# Altium PCB 编码器.PcbDoc
Units mil, origin at the board's own origin, x right, y up, seen from the top; angles counter-clockwise.
Board outline 2500 x 1695 mil, 2 copper layers (Top Layer, Bottom Layer); 79 components, 78 nets, 268 pads, 211 vias.
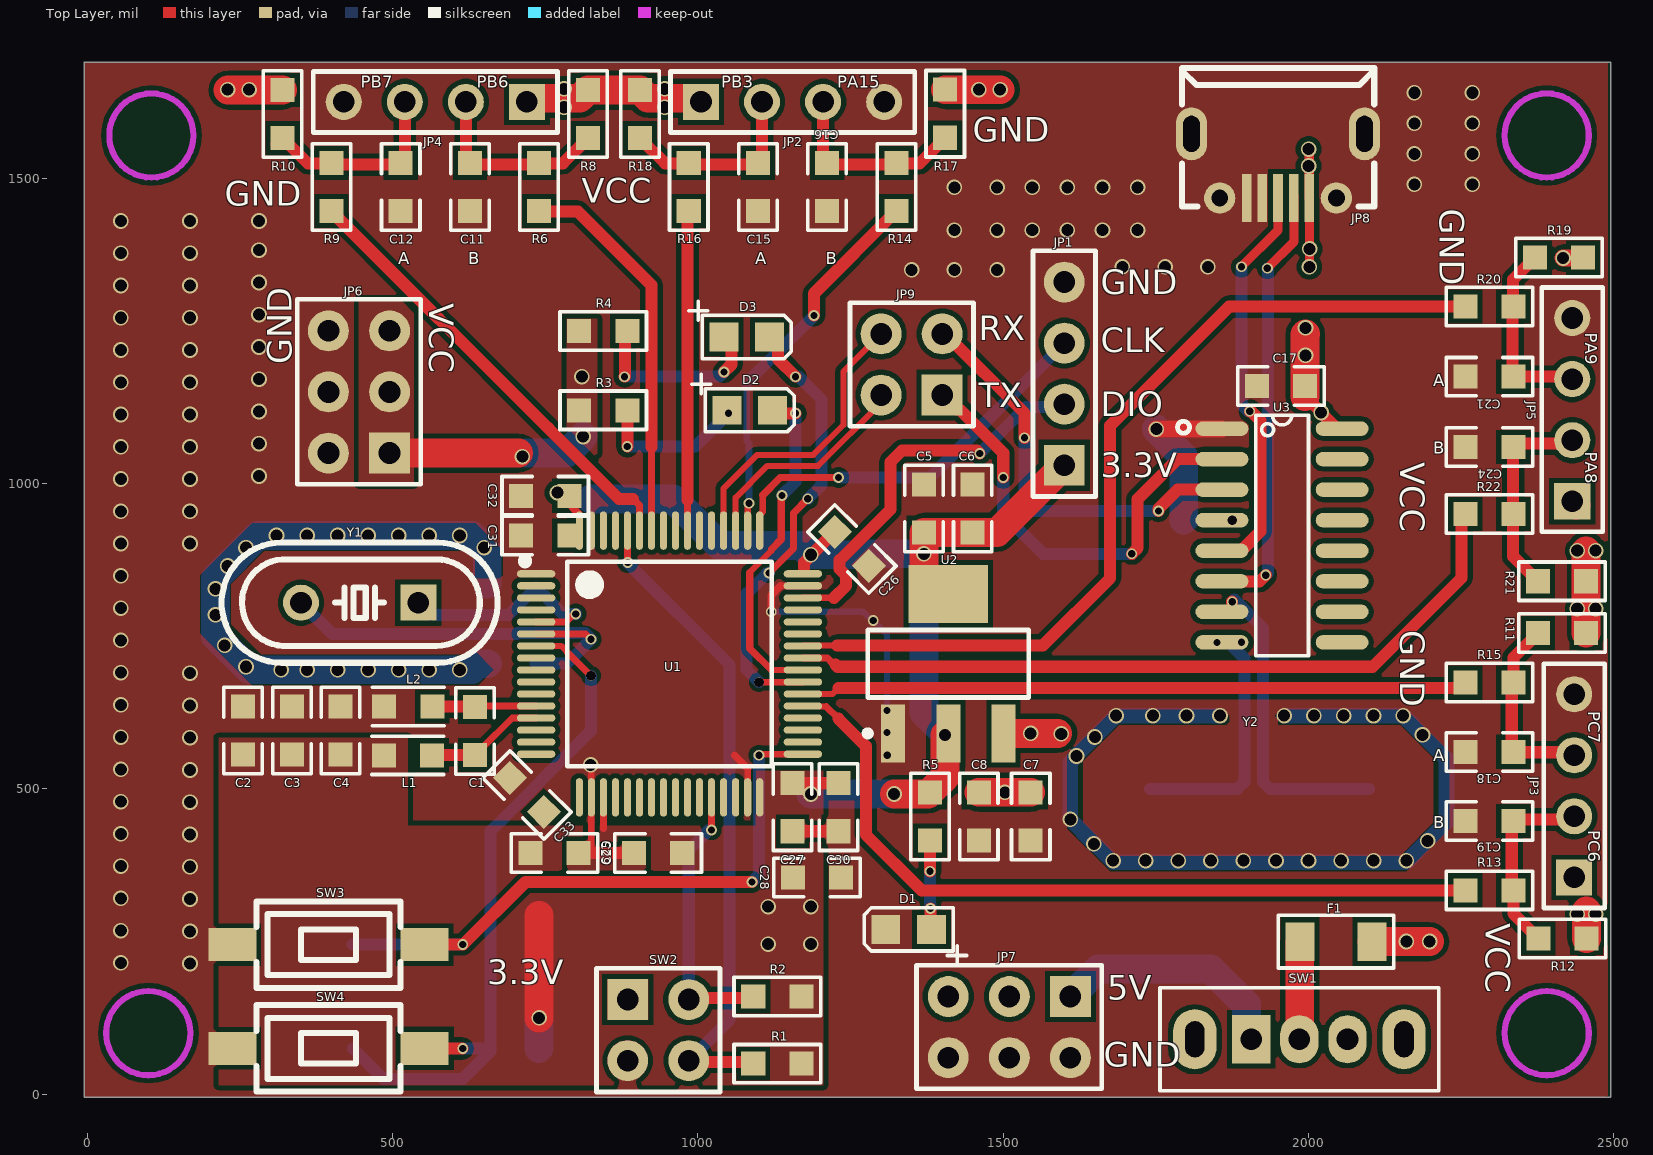
[diagram p0: Top Layer view]
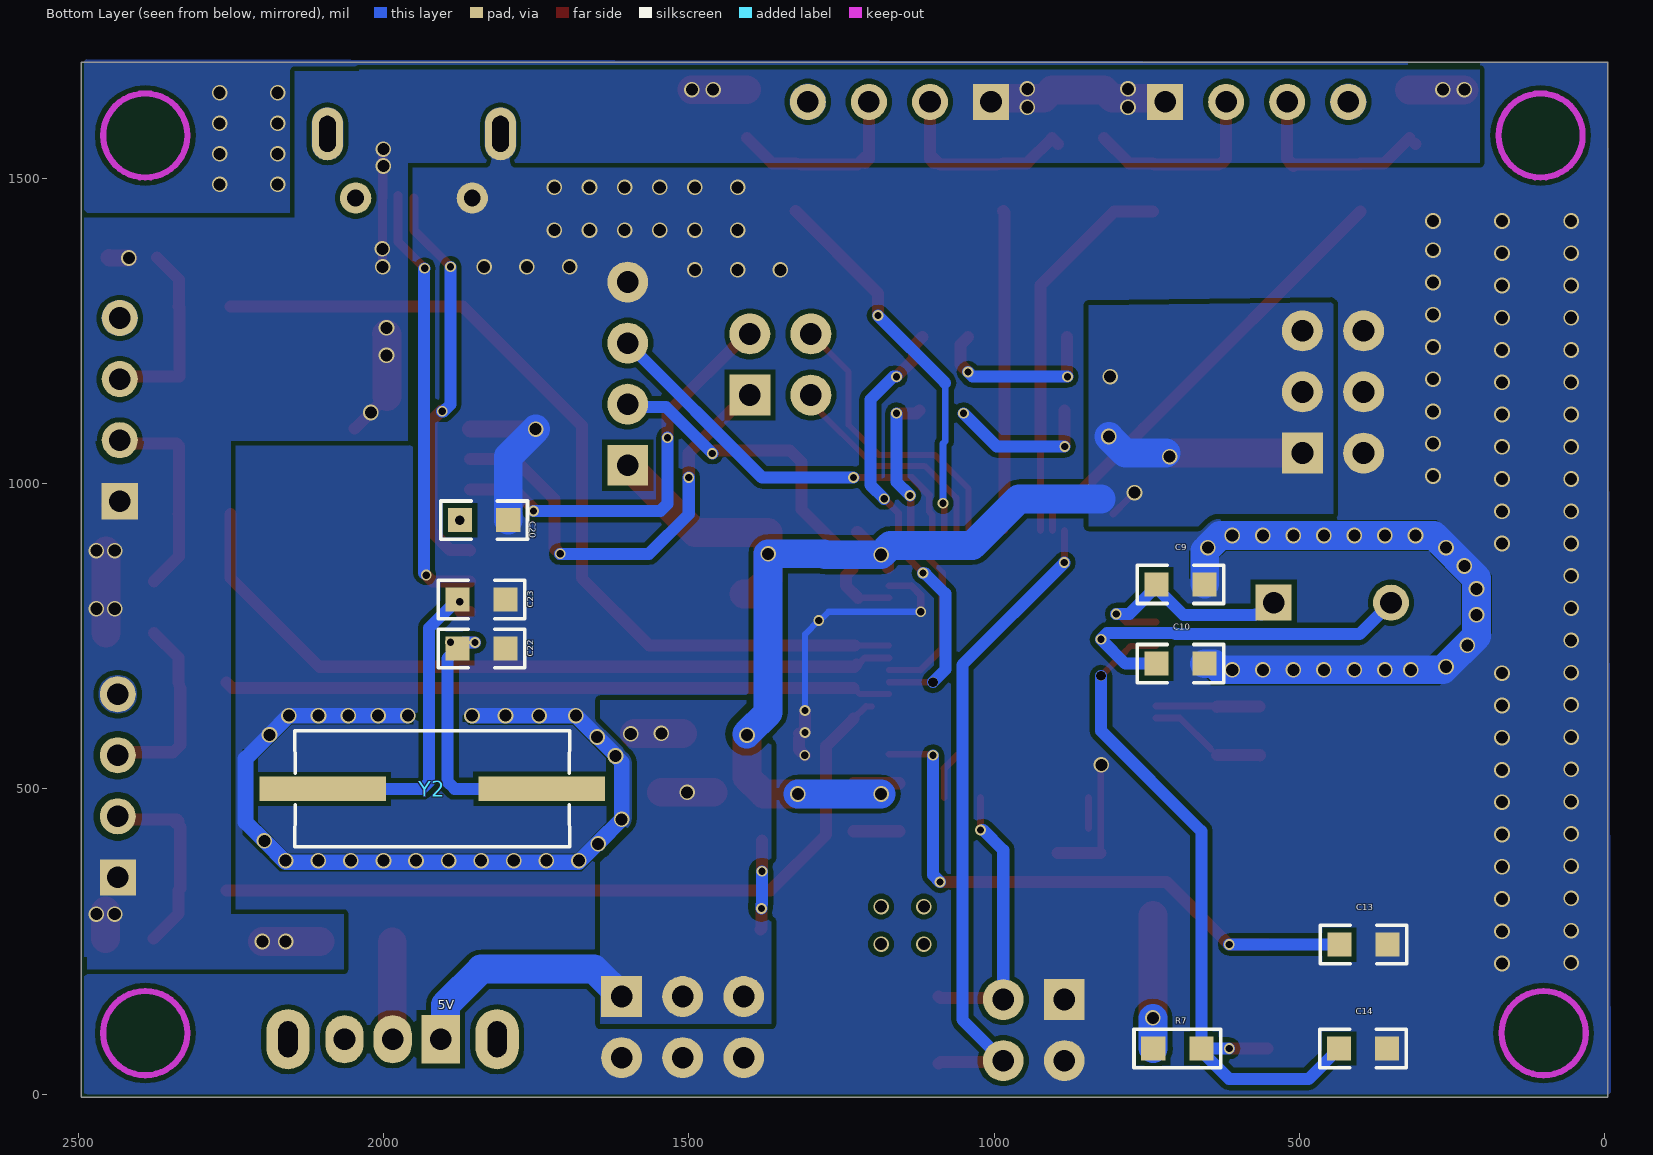
[diagram p1: Bottom Layer view, seen from below]

## Layer stack, top to bottom
Top Solder: solder mask 0.4, Solder Resist, Dk 3.5
Top Layer: signal copper 1.4
Dielectric 1: dielectric 12.6, FR-4, Dk 4.8
Bottom Layer: signal copper 1.4
Bottom Solder: solder mask 0.4, Solder Resist, Dk 3.5

## Board outline
-5,-5 -5,1690 2495,1690 2495,-5

## Design rules (kind name [scope] priority, off if disabled: settings)
Clearance Clearance_2 [InNetClass('PWR')] p1: gap=8 ignorepadtopadclearanceinfootprint=TRUE
Clearance Clearance_1 [InNetClass('GND')] p2: gap=8 ignorepadtopadclearanceinfootprint=TRUE
Clearance Clearance_3 [InNetClass('SIGNAL')] p3: gap=8 ignorepadtopadclearanceinfootprint=TRUE
Clearance [All] p4: gap=8 ignorepadtopadclearanceinfootprint=TRUE
DiffPairsRouting [All] p1: maxlimit=11.81 minlimit=8 mostfreqgap=10 toplayer_minwidth=8 toplayer_maxwidth=10 toplayer_prefwidth=10 bottomlayer_minwidth=8 bottomlayer_maxwidth=10 bottomlayer_prefwidth=10 maxuncoupledlength=500
PolygonConnect [All] p1: connectstyle=Direct reliefconductorwidth=10 reliefentries=4 polygonreliefangle="90 Angle" airgapwidth=10
RoutingVias [All] p1: holewidth=28 width=50 viastyle="Through Hole" minholewidth=28 minwidth=50 maxholewidth=28 maxwidth=50
SolderMaskExpansion [All] p1: expansion=4 istentingtop=FALSE
Width Width_1 [InNetClass('SIGNAL')] p1: maxlimit=47.24 minlimit=10 preferedwidth=19.68 minimp=50.000000 maximp=50.000000 favimp=50.000000
Width [InNetClass('PWR')] p2: maxlimit=47.24 minlimit=11.81 preferedwidth=47.24 minimp=50.000000 maximp=50.000000 favimp=50.000000
Width Width_4 [InNetClass('PWR')] p3: maxlimit=47.24 minlimit=11.81 preferedwidth=10 minimp=50.000000 maximp=50.000000 favimp=50.000000
Width Width_2 [InNetClass('GND')] p4: maxlimit=47.24 minlimit=11.81 preferedwidth=47.24 minimp=50.000000 maximp=50.000000 favimp=50.000000
Width Width_5 [InNetClass('SIGNAL')] p5: maxlimit=20 minlimit=11.81 preferedwidth=19.68 minimp=50.000000 maximp=50.000000 favimp=50.000000
Width Width_3 [All] p6: maxlimit=20 minlimit=5 preferedwidth=19.68 minimp=50.000000 maximp=50.000000 favimp=50.000000
29 further rules are at their usual default settings.

## Components (designator, comment, footprint, x,y, rotation, side; value= is the part's Value field where it differs from the comment)
C1 "0805c" 0805C 635,595 r90 top
C2 "0805c" 0805C 255,595.63 r90 top
C3 "0805c" 0805C 335,595.63 r90 top
C4 "0805c" 0805C 415,595.63 r90 top
C5 "0805c" 0805C 1370,959.37 r270 top
C6 "0805c" 0805C 1450,959.37 r270 top
C7 "0805c" 0805C 1545,455 r270 top
C8 "0805c" 0805C 1460,455 r270 top
C9 "22pF" 0805C 695,835 r180 bottom
C10 "22pF" 0805C 695,705 r180 bottom
C11 "10nF" 0805C 626.67,1485.63 r90 top
C12 "10nF" 0805C 513.33,1485.63 r90 top
C13 "0805c" 0805C 395,245 r180 bottom
C14 "0805c" 0805C 395.63,75 r180 bottom
C15 "10nF" 0805C 1098.33,1485.63 r90 top
C16 "10nF" 0805C 1211.67,1485.63 r270 top
C17 "0805c" 0805C 1955,1160 r0 top
C18 "10nF (103) 10% 50V" 0805C 2296.06,560.6 r180 top
C19 "10nF (103) 10% 50V" 0805C 2296.06,447.27 r180 top
C20 "0805c" 0805C 1835,940 r180 bottom
C21 "10nF" 0805C 2296.06,1175 r180 top
C22 "0805c" 0805C 1839.37,730 r180 bottom
C23 "0805c" 0805C 1839.37,810 r180 bottom
C24 "10nF" 0805C 2296.06,1060 r180 top
C25 "0805c" 0805C 765,395 r180 top
C26 "0805c" 0805C 1252.16,892.84 r135 top
C27 "0805c" 0805C 1155,470 r90 top
C28 "0805c" 0805C 1195,355 r0 top
C29 "0805c" 0805C 935,395 r0 top
C30 "0805c" 0805C 1230,470 r90 top
C31 "0805c" 0805C 750,915 r0 top
C32 "0805c" 0805C 750,980 r0 top
C33 "0805c" 0805C 720,490 r135 top
D1 "LED" 0805D 1345,270 r180 top
D2 "LED" 0805D 1085,1120 r0 top
D3 "LED" 0805D 1080,1240 r0 top
F1 "FUSE" 1206R 2045,250 r180 top
JP1 "SWD" SWD 1600,1180 r90 top
JP2 "PIN4" HDR1X4 1005,1625 r0 top
JP3 "PIN4" HDR1X4 2435,355 r90 top
JP4 "PIN4" HDR1X4 720,1625 r180 top
JP5 "PIN4" HDR1X4 2431.81,971.06 r90 top
JP6 "PWR3.3V" PWR 495,1050 r90 top
JP7 "PWR5V" PWR 1610,160 r180 top
JP8 "miniusb" MICRO-USB-SMD_MICROXNJ 1950,1520 r180 top
JP9 "2*2" CON20VP2R54-2X2TM 1350,1195 r90 top
L1 "0805L" 0805L 525,555 r0 top
L2 "0805L" 0805L 525.63,635 r0 top
R1 "0805r" 0805R 1130,50 r180 top
R2 "0805r" 0805R 1130,160 r180 top
R3 "0805r" 0805R 845,1120 r0 top
R4 "0805r" 0805R 845,1250 r0 top
R5 "0805r" 0805R 1380,455 r90 top
R6 "10KΩ" 0805R 740,1485.63 r270 top
R7 "0805r" 0805R 700,75 r0 bottom
R8 "10KΩ" 0805R 820,1605 r270 top
R9 "10KΩ" 0805R 400,1485.63 r270 top
R10 "10KΩ" 0805R 320,1605 r270 top
R11 "10KΩ" 0805R 2415,755 r180 top
R12 "10KΩ" 0805R 2415.63,255 r0 top
R13 "10KΩ" 0805R 2296.06,333.94 r0 top
R14 "10KΩ" 0805R 1325,1485.63 r270 top
R15 "10KΩ" 0805R 2296.06,673.94 r0 top
R16 "10KΩ" 0805R 985,1485.63 r270 top
R17 "10KΩ" 0805R 1405,1605.63 r90 top
R18 "10KΩ" 0805R 905,1605 r270 top
R19 "10KΩ" 0805R 2410,1370 r180 top
R20 "10KΩ" 0805R 2296.06,1290 r180 top
R21 "10KΩ" 0805R 2415,840 r180 top
R22 "10KΩ" 0805R 2296.06,950 r180 top
SW1 "SWTICH_3P" SWITCH_3P 1906.26,90 r0 top
SW2 "SW_BOOT" CON20VP2R54-2X2TM 935,105 r270 top
SW3 "KEY" SW-SMD_L6.1-W3.6-LS8.0 395,245 r180 top
SW4 "KEY" SW-SMD_L6.1-W3.6-LS8.0 395,75 r180 top
U1 "STM32F103RCT6" PCBComponent_1 786.61,869.53 r270 top
U2 "ASM1117-3.3" SOT223_N 1410,705 r90 top
U3 "CH340G" SOP16 1956.57,915 r270 top
Y1 "8MHz" HC-49US_L11.5-W4.5-P4.88 446.06,805 r180 top
Y2 "8MHz" HC-49S_L11.4-W4.8 1920,500 r180 top

## Footprints (in the part's own frame and the unit in brackets; to place one, negate y for a bottom-side part, rotate by r counter-clockwise, add the part's x,y. Pads: shape width x height; smd on the part's side, far side on the other; paste and mask are expansions set on the pad)
0805C [mm]
  rect 1x1 smd: 1(-1,0) 2(1,0)
  silkscreen extent -1.8,-0.8 1.8,0.8
0805D [mm]
  rect 1.2x1.2 smd: 1(-0.95,0) 2(0.95,0)
  silkscreen extent -2.42,-0.9 1.85,1.49
0805L [mm]
  rect 1x1 smd: 1(-1,0) 2(1,0)
  silkscreen extent -1.5,-0.8 1.5,0.8
0805R [mm]
  rect 1x1 smd: 1(-1,0) 2(1,0)
  silkscreen extent -1.8,-0.8 1.8,0.8
1206R [mm]
  rect 1.2x1.6 smd: 1(-1.5,0) 2(1.5,0)
  silkscreen extent -2.4,-1.1 2.4,1.1
CON20VP2R54-2X2TM [mm]
  rect 1.7x1.7 hole 0.9: 1(-1.27,-1.27)
  round 1.7 hole 0.9: 2(-1.27,1.27) 3(1.27,-1.27) 4(1.27,1.27)
  silkscreen extent -2.57,-2.57 2.57,2.57
HC-49S_L11.4-W4.8 [mm]
  rect 5.274x1.02 smd far side: 1(4.553,0) 2(-4.553,0)
HC-49US_L11.5-W4.5-P4.88 [mm]
  rect 1.5x1.5 hole 0.9: 1(-2.44,0)
  round 1.5 hole 0.9: 2(2.44,0)
  silkscreen extent -5.74,-2.5 5.74,2.5
HDR1X4 [mm] "Connector; Header; 4 Position"
  rect 1.5x1.5 hole 0.9: 1(0,0)
  round 1.5 hole 0.9: 2(2.54,0) 3(5.08,0) 4(7.62,0)
  silkscreen extent -1.27,-1.27 8.89,1.27
MICRO-USB-SMD_MICROXNJ [mm]
  rect 0.4x2 smd: 1(-1.3,1.327) 2(-0.65,1.327) 3(0,1.327) 4(0.65,1.327) 5(1.3,1.327)
  round 1.3 hole 0.7: 6(2.425,1.335) 9(-2.425,1.335)
  oval 1.3x2.2 hole 0.7 slot 1.5 at 90 deg: 7(3.6,-1.335) 8(-3.6,-1.335)
  silkscreen extent -4,-4.07 4,1.68
PCBComponent_1 [mm]
  oval 0.3x1.6 smd: 1(0.441,-1.311) 2(0.941,-1.311) 3(1.441,-1.311) 4(1.941,-1.311) 5(2.441,-1.311) 6(2.941,-1.311) 7(3.441,-1.311) 8(3.941,-1.311) 9(4.441,-1.311) 10(4.941,-1.311) 11(5.441,-1.311) 12(5.941,-1.311) 13(6.441,-1.311) 14(6.941,-1.311) 15(7.441,-1.311) 16(7.941,-1.311) 33(7.941,9.789) 34(7.441,9.789) 35(6.941,9.789) 36(6.441,9.789) 37(5.941,9.789) 38(5.441,9.789) 39(4.941,9.789) 40(4.441,9.789) 41(3.941,9.789) 42(3.441,9.789) 43(2.941,9.789) 44(2.441,9.789) 45(1.941,9.789) 46(1.441,9.789) 47(0.941,9.789) 48(0.441,9.789)
  oval 1.6x0.3 smd: 17(9.741,0.489) 18(9.741,0.989) 19(9.741,1.489) 20(9.741,1.989) 21(9.741,2.489) 22(9.741,2.989) 23(9.741,3.489) 24(9.741,3.989) 25(9.741,4.489) 26(9.741,4.989) 27(9.741,5.489) 28(9.741,5.989) 29(9.741,6.489) 30(9.741,6.989) 31(9.741,7.489) 32(9.741,7.989) 49(-1.359,7.989) 50(-1.359,7.489) 51(-1.359,6.989) 52(-1.359,6.489) 53(-1.359,5.989) 54(-1.359,5.489) 55(-1.359,4.989) 56(-1.359,4.489) 57(-1.359,3.989) 58(-1.359,3.489) 59(-1.359,2.989) 60(-1.359,2.489) 61(-1.359,1.989) 62(-1.359,1.489) 63(-1.359,0.989) 64(-1.359,0.489)
  silkscreen extent -0.24,-1.92 8.44,8.49
PWR [mm]
  rect 1.7x1.7 hole 0.9: 1(0,0)
  round 1.7 hole 0.9: 2(0,2.54) 3(2.54,0) 4(2.54,2.54) 5(5.08,0) 6(5.08,2.54)
  silkscreen extent -1.3,-1.3 6.4,3.84
SOP16 [mm]
  oval 0.6x2.2 smd: 1(-4.445,-2.5) 2(-3.175,-2.5) 3(-1.905,-2.5) 4(-0.635,-2.5) 5(0.635,-2.5) 6(1.905,-2.5) 7(3.175,-2.5) 8(4.445,-2.5) 9(4.445,2.5) 10(3.175,2.5) 11(1.905,2.5) 12(0.635,2.5) 13(-0.635,2.5) 14(-1.905,2.5) 15(-3.175,2.5) 16(-4.445,2.5)
  silkscreen extent -5,-4.35 5,1.1
SOT223_N [mm] "SOT223, 4-Leads, Body 6.5x3.5mm, Pitch 2.3mm, Lead Span 7mm, IPC Medium Density"
  rect 2.4x1 smd: 1(-2.9,2.3) 2(-2.9,0) 3(-2.9,-2.3)
  rect 2.4x3.3 smd: 4(2.9,0)
  silkscreen extent -3.02,-3.35 1.4,3.47, body extent -1.85,-3.35 1.85,3.35, height 1.7
SW-SMD_L6.1-W3.6-LS8.0 [mm]
  rect 2x1.38 smd: 1(-4,0) 2(4,0)
  silkscreen extent -3,-1.8 3,1.8
SWD [mm]
  rect 1.7x1.7 hole 0.9: 1(-3.81,0)
  round 1.7 hole 0.9: 2(-1.27,0) 3(1.27,0) 4(3.81,0)
  silkscreen extent -5.11,-1.3 5.11,1.3
SWITCH_3P [mm]
  rect 1.6x2 hole 0.9: 1(0,0)
  oval 1.6x2 hole 0.9: 2(2,0) 3(4,0)
  oval 1.8x2.5 hole 1.5 slot 0.8 at 0 deg: 4(-2.35,0) 4(6.35,0)
  silkscreen extent -3.8,-2.15 7.8,2.15

## Part data
C9 C10: library part "0805 22pF (220) 5% 50V", "贴片电容", Package=0805, SuppliersPartNumber=C1804, ComponentLink1Description=供应商链接, ComponentLink1URL=http://www.szlcsc.com/product/details_2156.html, Supplier=LC
C11 C12 C15 C16 C18 C19 C21 C24: library part "0805 10nF (103) 10% 50V", "贴片电容", Package=0805, SuppliersPartNumber=C1710, ComponentLink1Description=供应商链接, ComponentLink1URL=http://www.szlcsc.com/product/details_2062.html, Supplier=LC
R6 R8 R9 R10 R11 R12 R13 R14 R15 R16 R17 R18 R19 R20 R21 R22: library part "0805 10KΩ (1002) 1%", "贴片电阻", Package=0805, SuppliersPartNumber=C17414, ComponentLink1Description=供应商链接, ComponentLink1URL=http://www.szlcsc.com/product/details_18102.html, Supplier=LC
SW3 SW4: library part KEY_4P
U1: "ARM Cortex-M3 32-bit MCU, 256 KB Flash, 48 KB Internal RAM, 51 I/Os, 64-pin LQFP, -40 to 85 degC, Tray", I/Os (High Current)=51, Operating Frequency(F) (Processor speed) (MHz)=72, Supplier Part Number 1=497-9033-ND, Supply Voltage(Vcc) min (V)=2, A/D Converter="3x12-bit (16 Channel)", ComponentLink1Description="Manufacturer URL", ComponentLink1URL=http://www.st.com/web/en/home.html, ComponentLink2Description=Datasheet, ComponentLink2URL=http://www.st.com/st-web-ui/static/active/en/resource/technical/document/datasheet/CD00191185.pdf, ComponentLink3Description="Package Specification", ComponentLink3URL=http://www.st.com/st-web-ui/static/active/en/resource/technical/document/datasheet/DM00037051.pdf, Core="ARM Cortex-M3", D/A Converter="2x12-bit (2 Channel)", DatasheetVersion="Rev. 8", FLASH Size (Prog) (kB)=256, Internal RAM Size (kB)=48, Mounting Technology="Surface Mount", PackageDescription="64-Pin Low Profile Quad Flat Package, 10 x 10 mm Body, 0.5 mm Pitch", PackageReference=LQFP64, PackageVersion="Rev. 4, 06/2013", Packing=Tray, PartNumber=STM32F103RCT6, Supplier 1=Digi-Key, Supplier 2=Newark, Supplier 3=Newark, Supplier 4=Mouser, Supplier Part Number 2=01P4099, Supplier Part Number 3=57P1227, Supplier Part Number 4=511-STM32F103RCT6
Y1 Y2: library part "SMD-5032_2P 8MHz 20ppm 20pF", "贴片晶振", Package=SMD-5032_2P, SuppliersPartNumber=C115962, ComponentLink1Description=供应商链接, ComponentLink1URL=http://www.szlcsc.com/product/details_117214.html, Supplier=LC

## Via types
v1: diameter 25.59, hole 19.68, Top Layer to Bottom Layer, 169 vias
v2: diameter 17.72, hole 11.81, Top Layer to Bottom Layer, 39 vias
v3: diameter 15.75, hole 15.75, Top Layer to Bottom Layer, 3 vias

## Nets (pads, with @x,y where several pads share a name; then routed paths per layer and width w, separated by ;. In a path a pad name is that pad's centre, name@x,y a point inside that pad or via, vN(x,y) a via of type N, cw(c..) or ccw(c..) an arc to the next point about the centre after c; other vN are vias at no path point)
3.3V: C2.1 C3.1 C4.1 C5.2 C6.2 C25.2 C26.2 C27.2 C28.1 C29.2 C30.2 C31.2 C32.2 C33.1 JP1.1 JP6.1 JP6.3 JP6.5 L1.1 R1.1 R2.1 R3.1 R4.1 R5.2 R7.2 U1.19 U1.32 U1.48 U1.64 U2.2 U2.4 | length 2400.4
  Top Layer w11: 845.23,435 U1.19
  Top Layer w11.81: v1(770,985) 770.59,985 782.48,973.11 U1.64@805,950.59
  Top Layer w19.68: 1173.76,861.76 1173.76,870.57 1185,881.8 v1(1185,883.4)
  Top Layer w20: C27.2 1180,509.37 1183.93,505.44 1183.93,492.72 v1(1185,491.65) ; 1185,509.37 C30.2 ; v1(1185,883.4) 1186.02,883.4 1223.3,920.68 C26.2
  Top Layer w47.24: JP6.1 v1@706.72,1050 ; v1(740,125) 740,292.45 ; v1(1321.46,491.65) 1377.28,491.65 R5.2 1404.69,519.07 v1(1404.69,588.12) ; U2.4 1393.62,819.17 1370,842.8 v1(1370,885) C5.2 C6.2 1490,920 JP1.1
  Bottom Layer w47.24: v1@718.52,1050 785,1050 v1(811.98,1076.98) ; R7.2 740,75.63 v1@740,124.48 ; 825,975 959.2,975 1035.67,898.54 1169.87,898.54 v1(1185,883.4) 1276.7,883.4 1278.3,885 v1(1370,885) 1370,625 v1@1405,590 ; v1(1185,491.65) v1(1321.46,491.65)
  other v1: 1115,245.63 1185,245.63 1115,307.13 1185,307.13 712.62,1044.1 810,1175
5V: C7.1 C8.1 JP7.1 JP7.3 JP7.5 SW1.1 U2.3 | length 555.5
  Top Layer w47.24: C8.1 v1(1502.5,494.37) C7.1 ; U2.3@1510,590.83 v1(1544.86,590.83) ; v1@1545,590.69 v1(1544.86,590.83) ; v1@1589.17,590.83 v1(1544.86,590.83)
  Bottom Layer w47.24: JP7.1 1655,205 1840,205 1898.39,146.62 1898.39,97.87 SW1.1
  other v1: 1595,590
BOOT0: R1.2 SW2.4 U1.60 | length 1072.8
  Top Layer w11: v2@884.6,870.99 U1.60
  Top Layer w11.81: v2@884.6,870.99 v2(885.09,870.49)
  Top Layer w19.68: SW2.4 987.5,52.5 1088.13,52.5 R1.2
  Bottom Layer w19.68: v2(885.09,870.49) 885.09,869.91 1051.97,703.03 1051.97,121.97 SW2.4
BOOT1: R2.2 SW2.2 U1.28 | length 452.4
  Top Layer w11: v2@1022.4,432.72 U1.28
  Top Layer w11.81: v2(1022.28,432.6) v2@1022.4,432.72
  Top Layer w19.68: SW2.2 987.5,157.5 1088.13,157.5 R2.2
  Bottom Layer w19.68: SW2.2 985,399.68 v2@1017.91,432.6
CH340_D+: JP8.3 U3.5 | length 663.8
  Top Layer w15: v2(1890,1355) 1950,1415 JP8.3
  Top Layer w19.68: U3.5 1859.44,891.29 1890.93,891.29 1921.3,921.65 1921.3,1103.11 1904.95,1119.46 v2(1903.8,1118.31)
  Bottom Layer w19.68: v2(1890,1355) 1890,1129.84 1901.53,1118.31 v2(1903.8,1118.31)
CH340_D-: JP8.2 U3.6 | length 714
  Top Layer w15: v2(1932.5,1352.5) 1976.15,1396.15 JP8.2@1976.15,1471.56
  Top Layer w19.68: U3.6 1920,840 v2(1930,850)
  Bottom Layer w19.68: v2@1932.5,852.5 1933.48,853.48 1933.48,1351.52 v2(1932.5,1352.5)
GND: C2.2 C3.2 C4.2 C5.1 C6.1 C7.2 C8.2 C9.2 C10.2 C11.1 C12.1 C13.2 C14.2 C15.1 C16.2 C17.1 C18.2 C19.2 C20.2 C21.2 C22.2 C23.2 C24.2 C25.1 C26.1 C27.1 C28.2 C29.1 C30.1 C31.1 C32.1 C33.2 D1.2 JP1.4 JP2.4 JP3.4 JP4.4 JP5.4 JP6.2 JP6.4 JP6.6 JP7.2 JP7.4 JP7.6 JP8.4 JP8.5 JP8.6 JP8.7 JP8.8 JP8.9 L2.1 SW2.1 SW2.3 SW3.2 SW4.2 U1.1 U1.18 U1.31 U1.47 U1.63 U2.1 U3.1 | length 3675.3
  Top Layer w11: 825.55,395 U1.18 v1@825.55,541.15 ; U1.31 1081.45,533.55 ; 1135.24,832.48 U1.47
  Top Layer w11.81: 1060,555 1081.45,533.55 ; v2(1120,790) 1120,817.24 1135.24,832.48
  Top Layer w19.68: v2(1309.61,628.23) v2(1309.61,592.2) 1310.98,590.83 U2.1 ; v2(1310,555) 1319.45,564.45 U2.1@1319.45,582.36
  Top Layer w20: 825.55,395 C29.1 ; C27.1 C30.1
  Top Layer w27.56: v1(1750.66,1089.15) U3.1@1857.3,1089.15
  Bottom Layer w10: v2(1120,790) 1271.05,790 v2@1285,776.05 ; v2(1287.19,775.95) 1309.61,753.53 v2(1309.61,628.23) ; v1(1648.24,410) v1@1650.32,410 ; v1@1649.57,585 v1(1650,585) ; v1@1680,380 v1@1680,380.32
  Bottom Layer w25.59: v1(1620,553.85) 1610,543.85 v1(1610,450) 1648.24,411.76 v1(1648.24,410) ; v1@1620,555.43 v1@1649.57,585 ; v1(1650,585) v1(1685,620) v1(1745,620) v1(1800,620) v1(1855,620) ; v1@1650.32,410 v1@1680,380.32 ; v1@1680,380 2160,380 v1(2195,415) 2225.87,445.87 2225.87,549.13 v1(2186.54,588.46) v1(2155,620) v1(2106.25,620) v1(2057.5,620) v1(2008.75,620) v1(1960,620)
  Bottom Layer w47.24: v1(650,895) 630,915 v1(560,915) v1(510,915) v1(460,915) v1(410,915) v1(360,915) v1(310,915) 280,915 210,845 v1(210,785) 210,750 265,695 v1(360,695) v1(410,695) v1(460,695) v1(510,695) v1(560,695) 630,695 640,705 C10.2 ; C9.2@655,835.63 v1@655,890 ; v1(1750.66,1089.15) 1795.63,1044.18 C20.2
  other v1: 168.17,214.01 55,215 168.17,266.84 55,267.83 168.17,319.66 55,320.65 168.17,372.49 55,373.48 1679.89,382.52 1733.23,382.52 1786.58,382.52 1839.92,382.52 1893.27,382.52 1946.62,382.52 1999.96,382.52 2053.31,382.52 2106.65,382.52 2160,382.52 168.17,425.32 55,426.3 168.17,478.14 55,479.13 168.17,530.97 55,531.96 824.42,539.37 168.17,583.8 55,584.78 168.17,636.62 55,637.61 168.17,689.45 55,690.43 317.5,695 610,695 260,700 225,735 55,743.26 55,796.09 210,827.5 55,848.91 230,865 260,895 55,901.74 168.17,901.74 610,915 55,954.56 168.17,954.56 55,1007.39 168.17,1007.39 281.34,1012.39 55,1060.22 168.17,1060.22 281.34,1065.22 55,1113.04 168.17,1113.04 281.34,1118.04 55,1165.87 168.17,1165.87 281.34,1170.87 55,1218.69 168.17,1218.7 281.34,1223.7 55,1271.52 168.17,1271.52 281.34,1276.52 55,1324.35 168.17,1324.35 281.34,1329.35 1350,1350 1420,1350 1490,1350 1695,1355 1765,1355 1835,1355 55,1377.17 168.17,1377.17 281.34,1382.17 1420,1415 1490,1415 1547.5,1415 1605,1415 1662.5,1415 1720,1415 55,1430 168.17,1430 281.34,1430 1420,1485 1490,1485 1547.5,1485 1605,1485 1662.5,1485 1720,1485 2173.19,1490 2268.19,1490 2173.19,1540 2268.19,1540 2173.19,1590 2268.19,1590 2173.19,1640 2268.19,1640
NetC9_1: C9.1 U1.5 Y1.1 | length 362
  Top Layer w11: U1.5 784.21,773.43 v2@796.15,785.37
  Top Layer w11.81: v2@796.15,785.37 798.87,785.37 v2(800,786.5)
  Bottom Layer w19.68: Y1.1 Y1.1@561.81,785.32 ; 573.03,785.32 573.34,785 690,785 735,830 778.5,786.5 v2(800,786.5)
NetC10_1: C10.1 U1.6 Y1.2 | length 701.9
  Top Layer w11: U1.6 816.26,753.74 v2(825,745)
  Bottom Layer w19.68: Y1.2 401.5,753.5 703.05,753.5 704.54,755 815,755 v2(825,745) 785,705 C10.1
NetC11_2: C11.2 JP4.2 R6.1 R8.2 | length 308.6
  Top Layer w19.68: JP4.2 620,1531.67 C11.2 ; C11.2@632.17,1522.2 737.83,1522.2 740,1524.37 778.74,1524.37 R8.2
NetC12_2: C12.2 JP4.3 R9.1 R10.2 | length 318.7
  Top Layer w19.68: R10.2 361.26,1524.37 400,1524.37 402.17,1522.2 507.83,1522.2 510,1520.04 C12.2@515,1525.04 ; C12.2 520,1531.67 JP4.3
NetC18_1: C18.1 JP3.3 R11.2 R15.2 | length 309.6
  Top Layer w19.68: R11.2 2335.43,714.8 R15.2 2332.74,664.09 2332.74,571.53 2344.27,560 2430,560 JP3.3
NetC19_1: C19.1 JP3.2 R12.1 R13.2 | length 317.5
  Top Layer w19.68: C19.1 2338.16,450 2430,450 JP3.2 ; C19.1@2342.93,447.5 2332.74,437.3 2332.74,336.63 R13.2 2335.43,295.83 R12.1
NetC20_1: C20.1 U3.4
  other v3: 1875,940
NetC21_1: C21.1 JP5.3 R19.2 R20.1 | length 309.5
  Top Layer w19.68: R19.2 2335,1334.37 2335,1290.43 R20.1 2334.33,1288.89 2334.33,1175 2427.87,1175 JP5.3
NetC22_1: C22.1 U3.8 Y2.1 | length 424.9
  Top Layer w19.68: v2(1850.16,739.84) 1857.99,739.84 U3.8
  Bottom Layer w19.68: Y2.1 1883.47,500 1895,511.53 1895,713.74 1868.9,739.84 v2(1850.16,739.84)
  other v2: 1890,740
NetC23_1: C23.1 U3.7 Y2.2 | length 529
  Top Layer w19.68: U3.7 1873.18,790 1875,791.82 v2(1875,806.54)
  Bottom Layer w19.68: C23.1 1925,763.74 1925,511.53 1936.53,500 Y2.2
NetC24_1: C24.1 JP5.2 R21.2 R22.1 | length 339.7
  Top Layer w19.68: R21.2 2365.79,849.84 2335,880.63 2335,949.57 R22.1 2335,950.43 2335,1061.89 2338.64,1065.53 2426.28,1065.53 JP5.2
NetD1_1: D1.1 R5.1 | length 146.6
  Top Layer w19.68: v2(1380,365) R5.1 ; v2(1380.94,304.25) 1380.94,271.46 D1.1
  Bottom Layer w19.68: v2(1380,365) 1380,311.78 1380.94,310.85 v2(1380.94,304.25)
NetD2_1: D2.1 R3.2 | length 247.5
  Top Layer w19.68: v2(884.37,1060.63) R3.2
  Bottom Layer w19.68: v2(884.37,1060.63) 995.63,1060.63 v2(1050,1115)
NetD3_1: D3.1 R4.2 | length 298.5
  Top Layer w19.68: v2(880,1175) 880.24,1175.24 R4.2@880.24,1240 ; v2(1042.6,1182.6) 1055,1195 1055,1227.6 D3.1
  Bottom Layer w19.68: v2(880,1175) 1035,1175 v2(1042.6,1182.6)
NetF1_2: F1.2 SW1.2 | length 160.4
  Top Layer w19.68: SW1.2 SW1.2@1985.47,90.47 ; F1.2@1985.47,249.53 F1.2
  Top Layer w47.24: SW1.2@1985.47,90.47 F1.2@1985.47,249.53
NetJP2_2: C15.2 JP2.2 R16.1 R18.2 | length 333.8
  Top Layer w19.68: R18.2@895.16,1555.79 R18.2 946.26,1524.37 985,1524.37 994.84,1522.2 1088.47,1522.2 C15.2@1100,1533.74 ; C15.2 1105,1531.67 JP2.2
NetJP2_3: C16.1 JP2.3 R14.1 R17.1 | length 317.6
  Top Layer w19.68: JP2.3 1205,1531.67 C16.1 ; C16.1@1212.54,1533.68 1224,1522.22 ccw(c1224.93,1534.62) 1224.93,1522.18 1315.16,1522.18 1325,1524.37 1363.11,1524.37 1395.16,1556.42 R17.1
PA0: U1.14
PA1: U1.15
PA2: U1.16
PA3: U1.17
PA4: U1.20
PA5: U1.21
PA6: U1.22
PA7: U1.23
PA8: R22.2 U1.41 | length 1247.8
  Top Layer w11: U1.41 1212.17,714.37
  Top Layer w11.81: 1212.17,714.37 1220.89,705.65 1221.55,705.65 1223.7,703.5
  Top Layer w19.68: 1225.19,703.5 1228.69,700 2105,700 2250.63,845.63 R22.2@2250.63,950
PA9: R20.2 U1.42 | length 1447.3
  Top Layer w10: U1.42@1171.79,734.64 1220.11,734.64
  Top Layer w19.68: 1227.95,735 1565,735 1675,845 1675,1095 1870,1290 R20.2@2250.63,1290
PA10: U1.43
PA11: U1.44
PA12: U1.45
PA15: R14.2 U1.50 | length 627.1
  Top Layer w11: U1.50 1081.61,923.19 1081.61,963.88 1083.63,965.9 v2(1083.63,967.72)
  Top Layer w19.68: v2(1190,1275) 1190,1311.26 R14.2
  Bottom Layer w11: 1080,1165 1080,1069.08 1083.63,1065.45 v2(1083.63,967.72)
  Bottom Layer w19.68: 1080,1165 v2(1190,1275)
PB0: U1.26
PB1: U1.27
PB3: R16.2 U1.55 | length 524
  Top Layer w11: U1.55 983.03,972.69
  Top Layer w19.68: 983.03,972.69 983.03,1444.29 R16.2
PB4: U1.56
PB5: U1.57
PB6: R6.2 U1.58 | length 635.9
  Top Layer w11: U1.58 923.97,1060
  Top Layer w19.68: R6.2@740,1445.63 803.34,1445.63 923.97,1325 923.97,1060
PB7: R9.2 U1.59 | length 745.1
  Top Layer w11: U1.59 904.29,964.57
  Top Layer w11.81: 893.86,975 904.29,964.57
  Top Layer w19.68: R9.2@400,1445.63 755,1090.63 870.63,975 893.86,975
PB8: U1.61
PB9: U1.62
PB10: U1.29
PB11: U1.30
PB12: C13.1 SW3.1 U1.33 | length 1041.4
  Top Layer w11: v2@1101.89,556.89 U1.33
  Top Layer w19.68: SW3.1 v2(615,245) 717.64,347.64 v2(1088.47,347.64)
  Bottom Layer w19.68: C13.1 v2(615,245) ; v2(1088.47,347.64) 1100,359.17 v2(1100,555)
PB13: U1.34
PB14: U1.35
PB15: U1.36
PC0: U1.8
PC1: U1.9
PC2: U1.10
PC3: U1.11
PC4: U1.24
PC5: U1.25
PC6: R13.1 U1.37 | length 1266.3
  Top Layer w10: U1.37@1200,635 1210,635
  Top Layer w11: 1210,635 1230,615
  Top Layer w19.68: 1230,615 1275,570 1275,425 1366.06,333.94 R13.1
PC7: R15.1 U1.38 | length 1092.4
  Top Layer w10: U1.38 1220.32,655.32 1230,665
  Top Layer w19.68: 1230,665 2247.76,665 R15.1
PC8: D3.2 U1.39 | length 736.7
  Top Layer w10: v3(1100,674.69) U1.39@1172,674.69
  Top Layer w11.81: v2(1116.5,853.64) 1156.57,893.71 1156.57,951.57 v2(1180,975)
  Top Layer w19.68: D3.2 1131.02,1226.38 1131.02,1203.98 v2(1160,1175)
  Bottom Layer w19.68: v3@1100.35,674.65 1079.83,695.17 1079.83,819.83 1112.5,852.5 1115.36,852.5 v2(1116.5,853.64) ; v2(1160,1175) 1165,1175 1202.69,1137.32 1202.69,1036.3 1202.69,997.68 v2(1180,975)
PC9: D2.2 U1.40 | length 557.4
  Top Layer w10: 1085,854.56 1120.05,889.61 1120.05,892.09 1120.95,893 ; 1120.31,694.69 U1.40
  Top Layer w11.81: 1085,854.56 1085,730 1120.31,694.69 ; 1120.95,893 1136.6,908.64 1136.6,979.4 v2(1137.53,980.34)
  Top Layer w19.68: D2.2 1127.4,1115 v2(1160,1115)
  Bottom Layer w19.68: v2(1137.53,980.34) 1160,1002.81 v2(1160,1115)
PC10: JP9.2 U1.51 | length 356.4
  Top Layer w10: U1.51 1061.77,976.77 1113.91,1028.91 1196.67,1028.91 JP9.2@1300,1132.24
PC11: JP9.4 U1.52 | length 482.9
  Top Layer w10: U1.52 1042.08,992.08 1096.91,1046.91 1189.21,1046.91 1238.18,1095.88 1238.18,1183.18 JP9.4
PC12: U1.53
PC13: U1.2
PC14: U1.3
PC15: U1.4
PD2: U1.54
RESET: C14.1 R7.1 SW4.1 U1.7 | length 1160.8
  Top Layer w10: U1.7 775.94,734.06 785,725
  Top Layer w11: 785,725 v3(825,685)
  Top Layer w19.68: SW4.1 552.64,74.84 v2(614.84,74.84)
  Bottom Layer w19.68: C14.1 485,25 615,25 R7.1@660,70 ; v2@615,75 R7.1 660.63,430.63 825,595 v3(825,685)
RX: JP9.3 U3.3 | length 682
  Top Layer w19.68: JP9.3 1405,1245 1535,1115 v2(1535,1075) ; v2(1754.17,955) 1754.17,958.85 1785.31,990 U3.3
  Bottom Layer w19.68: v2(1535,1075) 1535,966.53 1546.53,955 v2(1754.17,955)
SWCLK: JP1.3 U1.49 | length 657.1
  Top Layer w11: U1.49 1101.14,948.84 1105.99,953.69 1105.99,980.99
  Top Layer w11.81: 1105.99,980.99 1135,1010 v2(1230.37,1010)
  Bottom Layer w19.68: v2(1230.37,1010) 1380,1010 JP1.3
SWDIO: JP1.2 U1.46 | length 648.2
  Top Layer w11: U1.46 1222.8,812.8
  Top Layer w19.68: 1222.8,812.8 1242.81,832.81 1242.81,849.12 1232.16,859.77 1232.16,874.55 1315,957.39 1315,1035 1334.01,1054.01 1456.84,1054.01 v2(1461.41,1049.43)
  Bottom Layer w19.68: v2(1461.41,1049.43) 1537.01,1125.03 1595.03,1125.03 JP1.2
TX: JP9.1 U3.2 | length 735.6
  Top Layer w19.68: JP9.1 1423.62,1121.38 1428.62,1121.38 1500,1050 v2(1500,1010) ; v2(1710.51,885) 1720,894.49 1720,974.68 1785.31,1040 U3.2
  Bottom Layer w19.68: v2(1500,1010) 1500,950 1565,885 v2(1710.51,885)
VCC: C17.2 F1.1 JP2.1 JP3.1 JP4.1 JP5.1 JP8.1 R8.1 R10.1 R11.1 R12.2 R17.2 R18.1 R19.1 R21.1 U3.16 | length 1166.3
  Top Layer w15: v1(2001.18,1355) 2001.51,1355.33 2001.51,1383.97 v1(2001.84,1384.3) 2001.51,1384.63 2001.51,1467.41 JP8.1 2001.18,1520 v1@2001.18,1547.74
  Top Layer w19.68: C17.2@1994.37,1142.76 U3.16@2047.13,1090
  Top Layer w27.56: v1(2416.84,1369.3) 2448.67,1369.3 R19.1
  Top Layer w47.24: v1@230.63,1644.37 R10.1 ; JP4.1 725.91,1630.91 795,1630.91 806.54,1630.91 R8.1 R18.1 918.46,1630.91 999.09,1630.91 JP2.1 ; R17.2 v1(1460,1645) v1(1495,1645) ; C17.2@1994.37,1142.76 C17.2 1994.37,1244.37 v1@1995,1245 ; F1.1 v1(2160,250) v1(2198.33,250) ; JP5.1 JP5.1@2437.72,965.16 ; R11.1 R21.1 2454.37,890 ; R12.2 2455,300
  other v1: 2440,295 2470,295 2440,795 2470,795 2440,890 2470,890 2020.75,1116.38 1995,1210 1995,1255 2000,1520 2000,1547.74 780.63,1616.25 945.63,1616.25 230,1645 265,1645 780.63,1646.25 945.63,1646.25
VDDA: C1.1 L1.2 U1.13 | length 182
  Top Layer w11: C1.1@645,565 695.95,615.95 U1.13
  Top Layer w19.68: L1.2 564.69,555.32 634.69,555.32 C1.1
VSSA: C1.2 L2.2 U1.12 | length 170.6
  Top Layer w11: C1.2@634.68,635.63 U1.12
  Top Layer w19.68: L2.2 565.31,634.69 634.68,634.69 C1.2
pads on no net: SW1.3 SW1.4 U3.9 U3.10 U3.11 U3.12 U3.13 U3.14 U3.15

## Polygon pours and split planes (outlines as drawn)
3.3V on Top Layer "3.3V_L01_P011" (solid, remove dead copper, pour order 11): 215,440 1205,440 1205,15 215,15
3.3V on Top Layer "3.3V_L01_P014" (solid, remove dead copper, pour order 14): 1095,530 1095,300 1205,300 1205,530
3.3V on Top Layer "3.3V_L01_P016" (solid, remove dead copper, pour order 16): 215,410 525.2,410 525.2,583.8 215,583.8
GND on Top Layer "GND_L01_P017" (solid, remove dead copper, pour order 17): -5,1690 2490,1690 2490,-10 2485,-5 -5,-5
3.3V on Top Layer "3.3V_L01_P000" (solid, remove dead copper, pour order 0): 445,1000 535,1000 535,1300 445,1300
3.3V on Top Layer "3.3V_L01_P012" (solid, remove dead copper, pour order 12): 785,1270 835,1270 835,1025 785,1025
3.3V on Top Layer "3.3V_L01_P002" (solid, remove dead copper, pour order 2): 220,580 515,580 515,525 220,525
GND on Bottom Layer "GND_L02_P015" (solid, remove dead copper, pour order 15): -5,1690 2490,1695 2490,-5 2485,0 -10,0
VCC on Bottom Layer "VCC_L02_P009" (solid, remove dead copper, pour order 9): 2065,295 2485,295 2485,205 2065,205
VCC on Bottom Layer "VCC_L02_P008" (solid, remove dead copper, pour order 8): 2250,1415 2490,1415 2490,225 2250,225
VCC on Bottom Layer "VCC_L02_P013" (solid, remove dead copper, pour order 13): 2055,1070 2055,1435 2490,1435 2490,1070
5V on Bottom Layer "5V_L02_P010" (solid, remove dead copper, pour order 10): 1365,645 1645,645 1645,115 1365,115
VCC on Bottom Layer "VCC_L02_P007" (solid, remove dead copper, pour order 7): 1960,1675 2145,1675 2145,1070 1960,1070
VCC on Bottom Layer "VCC_L02_P004" (solid, remove dead copper, pour order 4): 205,1677.5 2040,1677.5 2040,1525 205,1525
3.3V on Bottom Layer "3.3V_L02_P001" (solid, remove dead copper, pour order 1): 445,1297.13 445,930 845,930 845,1010 845,1292.12

## Keep-outs
Keep-Out Layer:
  circle w10: c100,100 r68.9
  circle w10: c2390,100 r68.9
  circle w10: c2390,1570 r68.9
  circle w10: c105,1570 r68.9

## Other copper
Top Layer:
  pour cut-out: 610,720 620,710 620,670 640,670 652.5,682.5 625,710 625,720
  pour cut-out: 1680,630 1860,630 1870,620 1870,610 1865,605 1690,605 1630,545 1630,445 1685,390 2155,390 2155,395 2205,445 2205,550 2150,605 1950,605 1950,615 1945,620 1955,630 2160,630 2230,560 2230,435 2160,365 1675,365 1605,435 1605,555
  pour cut-out: 635,875 665,905 680,890 680,850 675,845 635,845
  pour cut-out: 635,935 680,890 650,890 635,875 620,890 615,890
  pour cut-out: 620,720 630,720 635,725 665,695 640,670
  pour cut-out: 285,720 620,720 620,690 640,670 270,670
  pour cut-out: 185,755 270,670 285,685 285,720 235,770
  pour cut-out: 190,855 185,850 185,755 220,755 235,770 235,835
  pour cut-out: 270,935 190,855 210,835 235,835 290,890
  pour cut-out: 270,935 635,935 635,890 290,890
Bottom Layer:
  pour cut-out: 1680,630 1860,630 1870,620 1870,610 1865,610 1860,605 1690,605 1635,550 1635,445 1685,395 2155,395 2205,445 2205,550 2150,605 1950,605 1950,615 1945,620 1955,630 2160,630 2225,565 2230,565 2230,425 2170,365 1675,365 1605,435 1605,555
  pour cut-out: 275,940 625,940 675,890 680,890 680,845 675,840 635,840 635,875 620,890 285,890 285,885 235,835 235,770 290,715 645,715 665,695 645,675 645,670 270,670 185,755 185,850

## Silkscreen, mask and mechanical layers (free items; w line width, h text height)
Top Overlay:
  text "PB7" at 448,1648 h20
  text "PB6" at 638,1648 h20
  text "PB3" at 1038,1648 h20
  text "PA15" at 1228,1648 h20
  text "GND" at 1450,1560 h40
  text "VCC" at 810,1460 h40
  text "GND" at 225,1455 h40
  text "GND" at 2215,1450 h40 r270
  text "A" at 509,1359 h20
  text "B" at 624,1359 h20
  text "A" at 1094,1359 h20
  text "B" at 1209,1359 h20
  text "GND" at 1660,1310 h40
  text "VCC" at 560,1295 h40 r270
  text "PA9" at 2453,1247 h20 r270
  text "RX" at 1460,1235 h40
  text "CLK" at 1660,1215 h40
  text "GND" at 335,1195 h40 r90
  text "A" at 2204.53,1159 h20
  text "TX" at 1460,1125 h40
  text "DIO" at 1660,1110 h40
  text "PA8" at 2453,1052 h20 r270
  text "B" at 2204.53,1049 h20
  text "VCC" at 2150,1035 h40 r270
  text "3.3V" at 1660,1010 h40
  text "GND" at 2150,760 h40 r270
  text "PC7" at 2458,627 h20 r270
  text "A" at 2204.53,545.15 h20
  text "B" at 2204.53,435.15 h20
  text "PC6" at 2458,432 h20 r270
  text "VCC" at 2290,280 h40 r270
  text "3.3V" at 655,180 h40
  text "5V" at 1670,155 h40
  text "GND" at 1665,45 h40
Bottom Overlay:
  text "5V" at 1911,139 h15
Mechanical 1:
  circle w10: c100,100 r68.9
  circle w10: c2390,100 r68.9
  circle w10: c2390,1570 r68.9
  circle w10: c105,1570 r68.9
  lines w10: -5,-5 -5,1690 2495,1690 2495,-5 -5,-5
Mechanical 15:
  lines w0.1: 1952.74,1532.26 1954.74,1534.26